# Altium PCB 2S_BatteryPack_V100.PcbDoc
Units mm, origin at the board's own origin, x right, y up, seen from the top; angles counter-clockwise.
Board outline 96.01 x 59.44 mm, 2 copper layers (Top Layer, Bottom Layer); 17 components, 10 nets, 49 pads, 10 vias.
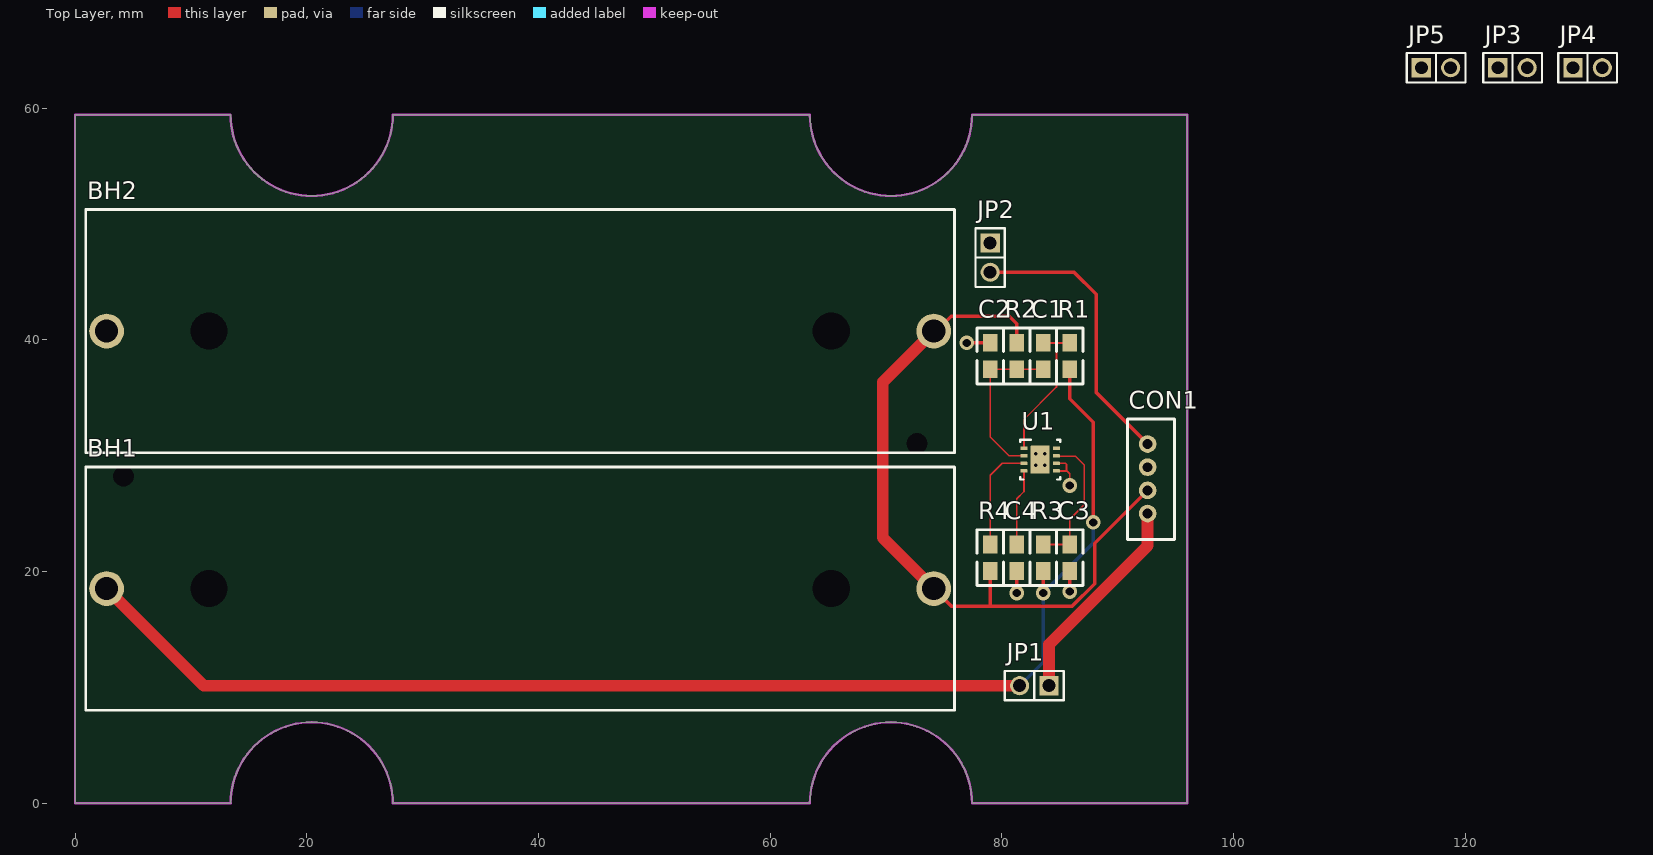
[diagram p0: Top Layer view]
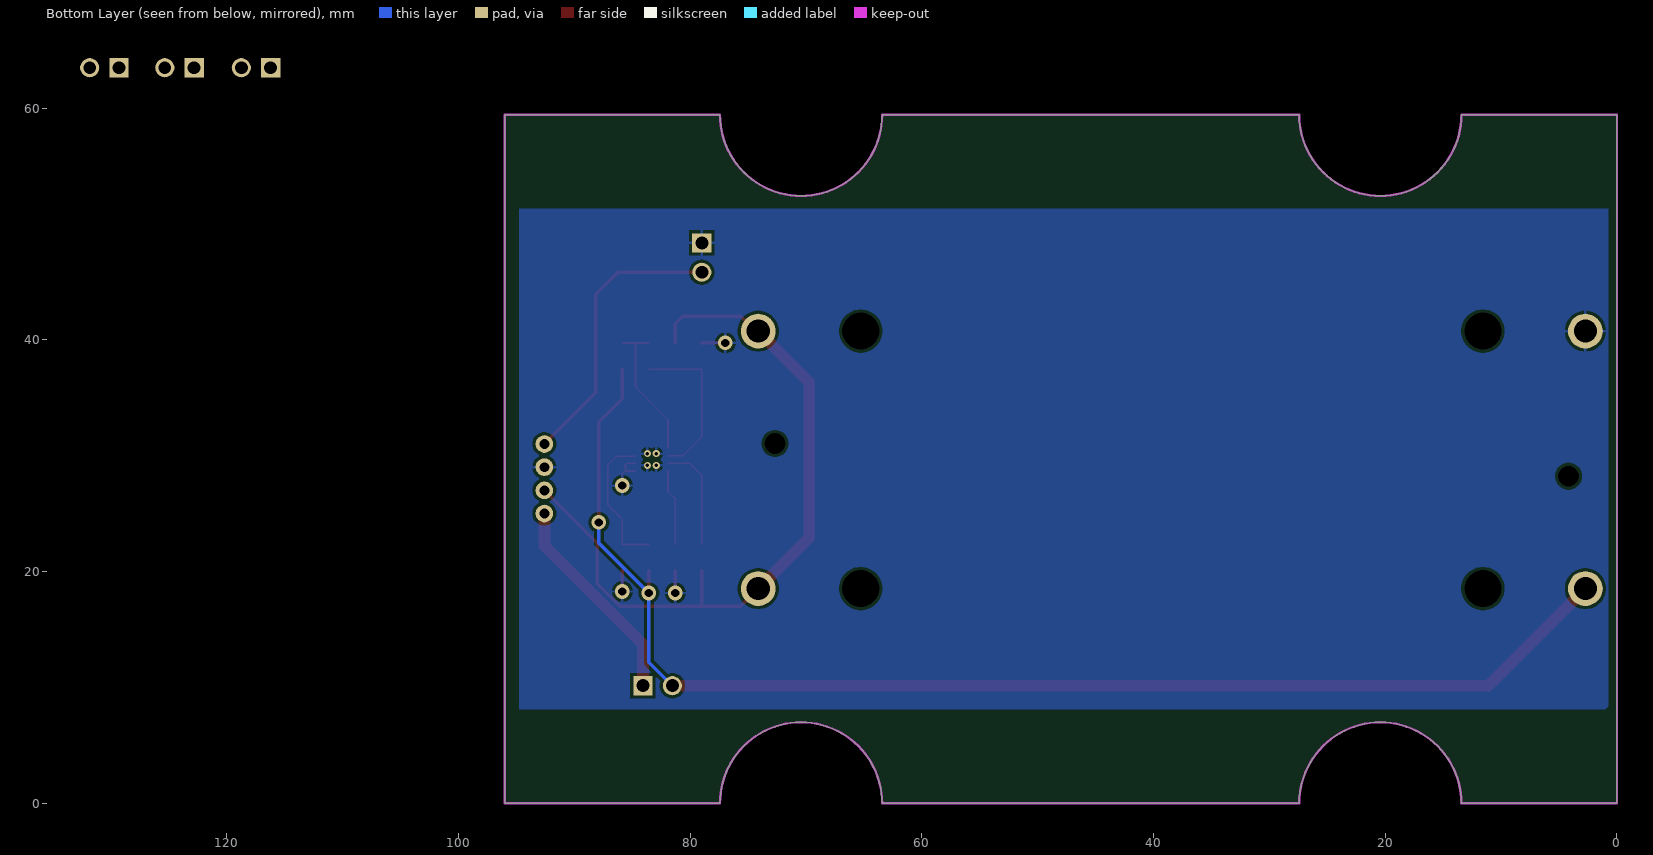
[diagram p1: Bottom Layer view, seen from below]

## Layer stack, top to bottom
Top Solder: solder mask 0.0102, Solder Resist, Dk 3.5
Top Layer: signal copper 0.0356
Dielectric 1: dielectric 0.32, FR-4, Dk 4.8
Bottom Layer: signal copper 0.0356
Bottom Solder: solder mask 0.0102, Solder Resist, Dk 3.5

## Board outline
0,0 0,59.436 13.428,59.436 ccw(c20.428,59.436) 27.428,59.436 63.428,59.436 ccw(c70.428,59.436) 77.428,59.436 96.012,59.436 96.012,0 77.428,0 ccw(c70.428,0) 63.428,0 27.432,0 27.428,0 ccw(c20.428,0) 13.428,0

## Design rules (kind name [scope] priority, off if disabled: settings)
Clearance [All] p1: gap=0.254 ignorepadtopadclearanceinfootprint=FALSE except(0: Arc-Hole Track-Hole SMDPad-Hole THPad-Hole Via-Hole Fill-Hole Poly-Hole Region-Hole Text-Hole)
PolygonConnect [All] p1: connectstyle=Relief reliefconductorwidth=0.254 reliefentries=4 polygonreliefangle="90 Angle" airgapwidth=0.254
RoutingVias [All] p1: holewidth=0.711 width=1.27 viastyle="Through Hole" minholewidth=0.711 minwidth=1.27 maxholewidth=0.711 maxwidth=1.27
SolderMaskExpansion [All] p1: expansion=0.102 istentingtop=FALSE
Width [All] p1: maxlimit=1.016 minlimit=0.152 preferedwidth=0.305 minimp=50.000000 maximp=50.000000 favimp=50.000000
30 further rules are at their usual default settings.

## Classes and differential pairs
component class 2S1P_BatteryPack_V100: BH1 C1 C2 C3 CON1 JP1 JP2 JP3 JP4 JP5 R1 R2 R3 U1

## Components (designator, comment, footprint, x,y, rotation, side; value= is the part's Value field where it differs from the comment)
BH1 "BHC-18650-1P" 18650_HOLDER 38.428,18.542 r180 top
BH2 "BHC-18650-1P" 18650_HOLDER 38.428,40.767 r0 top
C1 "100nF / 50V" 0805_C 83.566,38.608 r270 top
C2 "100nF / 50V" 0805_C 78.994,38.608 r90 top
C3 "100nF / 50V" 0805_C 85.852,21.209 r90 top
C4 "220nF / 50V" 0805_C 81.28,21.209 r90 top
CON1 "BATTERY_HOLDER_2S" MOLEX-53253-0470 92.583,28.019 r90 top
JP1 "JUMPER2 2.54MM" JUMPER_5 82.804,10.16 r180 top
JP2 "JUMPER2 2.54MM" JUMPER_5 78.994,47.117 r270 top
JP3 "JUMPER2 2.54MM" JUMPER_5 124.079,63.5 r0 top
JP4 "JUMPER2 2.54MM" JUMPER_5 130.556,63.5 r0 top
JP5 "JUMPER2 2.54MM" JUMPER_5 117.475,63.5 r0 top
R1 "150R" 0805 85.852,38.608 r90 top
R2 "220R" 0805 81.28,38.608 r270 top
R3 "100R" 0805 83.566,21.209 r90 top
R4 "100R" 0805 78.994,21.209 r90 top
U1 "BQ29209DRBR" VSON-8 83.309,29.677 r0 top

## Footprints (in the part's own frame and the unit in brackets; to place one, negate y for a bottom-side part, rotate by r counter-clockwise, add the part's x,y. Pads: shape width x height; smd on the part's side, far side on the other; paste and mask are expansions set on the pad)
0805 [mil]
  rect 60x50 smd: 1(-45,0) 2(45,0)
  silkscreen extent -95,-45 95,45, body extent -39,-25 39,25, height 24
0805_C [mil]
  rect 60x50 smd: 1(-45,0) 2(45,0)
  silkscreen extent -95,-45 95,45, body extent -41,-27 41,27, height 30
18650_HOLDER [mm]
  round 3 hole 2: 1(35.7,0) 2(-35.7,0)
  round 0 hole 3.2 unplated: ""(-26.85,0) ""(26.85,0)
  round 1 hole 1.8 unplated: ""(34.25,-9.7)
  silkscreen extent -37.5,-10.5 37.5,10.5, body extent -37.5,-10.5 37.5,10.5, height 21
JUMPER_5 [mil]
  rect 65x65 hole 44: 1(-50,0)
  round 65 hole 44: 2(50,0)
  silkscreen extent -100,-50 100,50, body extent -99,-49 104,49, height 488
MOLEX-53253-0470 [mm] "2.00mm Pitch, Micro-Latch PCB Header, Single Row, Vertical, Through Hole, Tin (Sn) Plating, 4 Circuits,"
  round 1.524 hole 0.85: 1(-3,0) 2(-1,0) 3(1,0) 4(3,0)
  silkscreen extent -5.26,-2.31 5.16,1.75, body extent -5.03,-2.12 4.97,1.53, height 5.51
VSON-8 [mm] "SON, 8-Leads, Body 3x3mm, Pitch 0.65mm, Thermal Pad 2.4x1.65mm, TI Recommended"
  rrect33% 0.6x0.3 smd: 1(-1.4,0.975) 2(-1.4,0.325) 3(-1.4,-0.325) 4(-1.4,-0.975) 5(1.4,-0.975) 6(1.4,-0.325) 7(1.4,0.325) 8(1.4,0.975)
  rrect6% 1.65x2.4 smd paste-1.2: 9(0,0)
  silkscreen extent -1.73,-1.73 1.73,1.73, body extent -1.5,-1.5 1.5,1.5, height 0.96

## Part data
BH1 BH2: library part 413, "18650 Battery Cell Holder THT", Azonosító=413, Category=Accessories, Help URL=https://www.hestore.hu/prod_getfile.php?id=9225, Part Number=BHC-18650-1P, Subcategory=ACCE_Battery, Supplier 1=HESTORE, Supplier 1 order number=100.373.04
C1 C2 C3: library part 149, "100nF 50V X7R", Part Number=SMD0805-100nF-50V, Azonosító=149, Category=Passives, Subcategory=PASS_Capacitor, Supplier 1=HESTORE, Supplier 1 order number=100.011.22
C4: library part 150, "220nF 50V Y5V", Part Number=SMD0805-220nF-50V, Azonosító=150, Category=Passives, Subcategory=PASS_Capacitor, Supplier 1=HESTORE, Supplier 1 order number=100.200.75
CON1: library part 380, "2S Battery with NTC thermistor", Azonosító=380, Category=Accessories, Part Number=BATTERY_HOLDER_2S, Subcategory=ACCE_Battery, Supplier 1=MOUSER, Supplier 1 order number=538-53253-0470
JP1 JP2 JP3 JP4 JP5: library part 246, Azonosító=246, Category=Connectors, Part Number="JUMPER2 2.54MM", Subcategory=CONN_Other, Supplier 1=FARNELL, Supplier 1 order number=2356153
R1: library part 46, "150R 0805 0.125W 5%", Part Number="SMD0805-150R 5%", Azonosító=46, Category=Passives, Subcategory=PASS_Resistor, Supplier 1=HESTORE, Supplier 1 order number=100.011.49
R2: library part 47, "220R 0805 0.125W 5%", Part Number="SMD0805-220R 5%", Azonosító=47, Category=Passives, Subcategory=PASS_Resistor, Supplier 1=HESTORE, Supplier 1 order number=100.011.62
R3 R4: library part 45, "100R 0805 0.125W 5%", Part Number="SMD0805-100R 5%", Azonosító=45, Category=Passives, Subcategory=PASS_Resistor, Supplier 1=HESTORE, Supplier 1 order number=100.449.24
U1: library part 367, "Voltage Protection with Automatic Cell Balance for 2-Cell Li-Ion Batteries, OVP=4.3 V, -40 to 85 degC, 8-pin SON (DRB), Green (RoHS & no Sb/Br)", Manufacturer="Texas Instruments", Over Voltage Protection=N, Azonosító=367, Category=Semiconductors, ComponentLink1Description=Datasheet, ComponentLink1URL=http://www.ti.com/general/docs/lit/getliterature.tsp?genericPartNumber=BQ29209&fileType=pdf, DatasheetVersion=SLUSA52A, Eco-Plan="Green (RoHS & no Sb/Br)", Help URL=https://www.ti.com/lit/ds/symlink/bq29209.pdf?ts=1707500814876&ref_url=https%253A%252F%252Fwww.ti.com%252Fproduct%252Fde-de%252FBQ29209, Lead Acid=N, Li-Ion=N, Li-Polymer=N, Mounting Technology="Surface Mount", NiCd=N, NiMH=N, PackageDescription="8-Pin Plastic Small Outline No-Lead, 3 x 3 x 1 mm Body, 0.65 mm Pitch, Exposed Pad", PackageReference=DRB0008B, PackageVersion="revK, Jun-2012", Part Number=BQ29209DRBR, PartNumber=BQ29209DRBR, Subcategory=IC_Power, SubFamily="Lithium Ion Protection", Supplier 1=MOUSER, Supplier 1 order number=595-BQ29209DRBR

## Via types
v1: diameter 1.27, hole 0.711, Top Layer to Bottom Layer, tented both sides, 6 vias
v2: diameter 0.61, hole 0.305, Top Layer to Bottom Layer, 4 vias

## Nets (pads, with @x,y where several pads share a name; then routed paths per layer and width w, separated by ;. In a path a pad name is that pad's centre, name@x,y a point inside that pad or via, vN(x,y) a via of type N, cw(c..) or ccw(c..) an arc to the next point about the centre after c; other vN are vias at no path point)
+VBAT: BH1.1 JP1.2 R1.1 R3.1 | length 115
  Top Layer w0.305: v1(83.566,18.161) R3.1 ; R1.1 85.852,34.925 87.884,32.893 v1(87.884,24.257)
  Top Layer w1.016: BH1.1 11.11,10.16 JP1.2
  Bottom Layer w0.305: JP1.2 83.566,12.192 v1(83.566,18.161) 87.884,22.479 v1(87.884,24.257)
GND: BH2.2 C2.2 C3.1 C4.1 CON1.3 JP2.1 U1.5 U1.6 U1.9 | length 9.5
  Top Layer w0.152: U1.5 85.598,28.702 85.852,28.448 v1(85.852,27.432) ; U1.6 85.494,29.352 85.583,29.263 85.583,28.702
  Top Layer w0.305: v1(76.962,39.751) C2.2 ; v1(81.28,18.161) C4.1 ; v1(85.852,18.288) C3.1
  other v2: 82.928,29.169 83.69,29.169 82.928,30.185 83.69,30.185
NetBH1_2: BH1.2 BH2.1 CON1.2 R2.1 R4.1 | length 63.8
  Top Layer w0.305: BH1.2 75.652,17.018 78.994,17.018 ; BH2.1 74.356,40.767 75.626,42.037 80.645,42.037 81.28,41.402 R2.1 ; R4.1 78.994,17.018 ; CON1.2 88.011,22.447 88.011,18.974 86.055,17.018 78.994,17.018
  Top Layer w1.016: BH1.2 69.723,22.947 69.723,36.362 BH2.1
NetC1_1: C1.1 R1.2 U1.1 | length 12.5
  Top Layer w0.152: U1.1 81.909,33.141 84.709,35.941 84.709,39.751 ; C1.1 84.709,39.751 ; R1.2 84.709,39.751
NetC1_2: C1.2 C2.1 R2.2 U1.2 | length 14
  Top Layer w0.152: U1.2 80.615,30.002 78.994,31.623 C2.1 R2.2 C1.2
NetC3_2: C3.2 R3.2 U1.7 | length 12.4
  Top Layer w0.152: R3.2 C3.2 85.852,24.511 87.122,25.781 87.122,29.21 86.36,29.972 84.739,29.972 U1.7
NetC4_2: C4.2 U1.4 | length 6.6
  Top Layer w0.152: C4.2 81.28,26.289 81.909,26.918 U1.4
NetCON1_1: CON1.1 JP1.1 | length 18.4
  Top Layer w1.016: JP1.1 84.074,13.744 92.583,22.253 CON1.1
NetCON1_4: CON1.4 JP2.2 | length 24.7
  Top Layer w0.305: JP2.2 86.233,45.847 88.138,43.942 88.138,35.464 CON1.4
NetR4_2: R4.2 U1.3 | length 9.3
  Top Layer w0.152: R4.2 78.994,28.321 80.025,29.352 U1.3
pads on no net: BH1. BH2. JP3.1 JP3.2 JP4.1 JP4.2 JP5.1 JP5.2 U1.8

## Polygon pours and split planes (outlines as drawn)
GND on Bottom Layer "NONET_L-01_P-001" (solid, pour order 0): 94.742,8.128 1.016,8.128 0.762,8.382 0.762,51.308 94.742,51.308

## Keep-outs
Keep-Out Layer:
  lines w0.2: 13.428,0 cw(c20.428,0) 27.428,0 ; 13.432,0 0,0 0,59.436 13.428,59.436 ccw(c20.428,59.436) 27.428,59.436 63.428,59.436 ccw(c70.428,59.436) 77.428,59.436 96.012,59.436 96.012,4.064 96.012,0 77.428,0 ccw(c70.428,0) 63.428,0 27.432,0 ; 27.432,0 27.432,0